# Altium PCB PCBLAST.PcbDoc
Units mm, origin at the board's own origin, x right, y up, seen from the top; angles counter-clockwise.
Board outline 98.04 x 98.81 mm, 2 copper layers (Top Layer, Bottom Layer); 65 components, 53 nets, 192 pads, 5 vias.
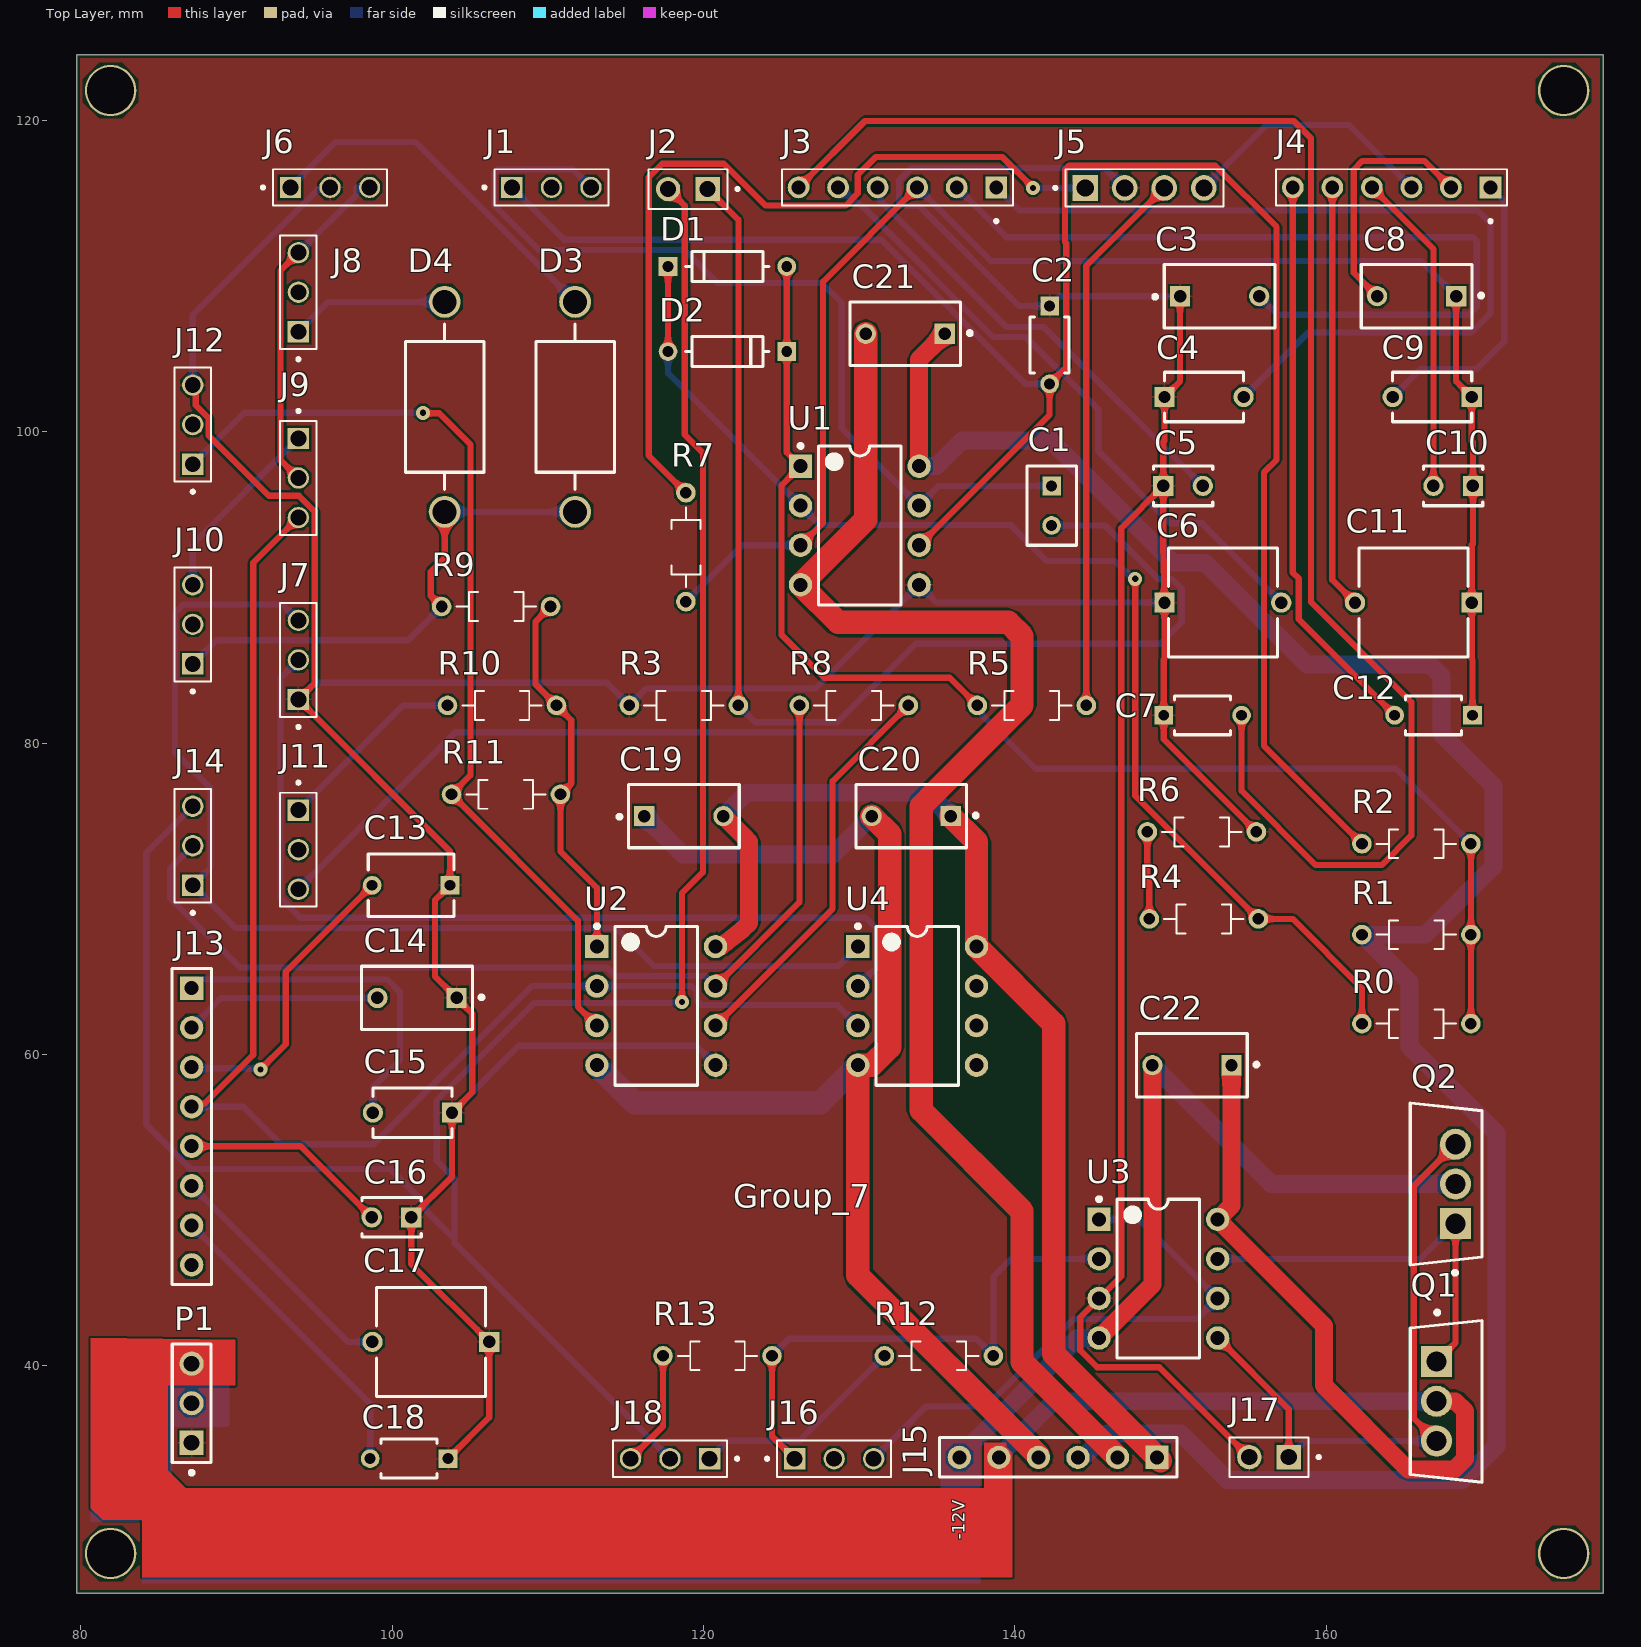
[diagram p0: Top Layer view]
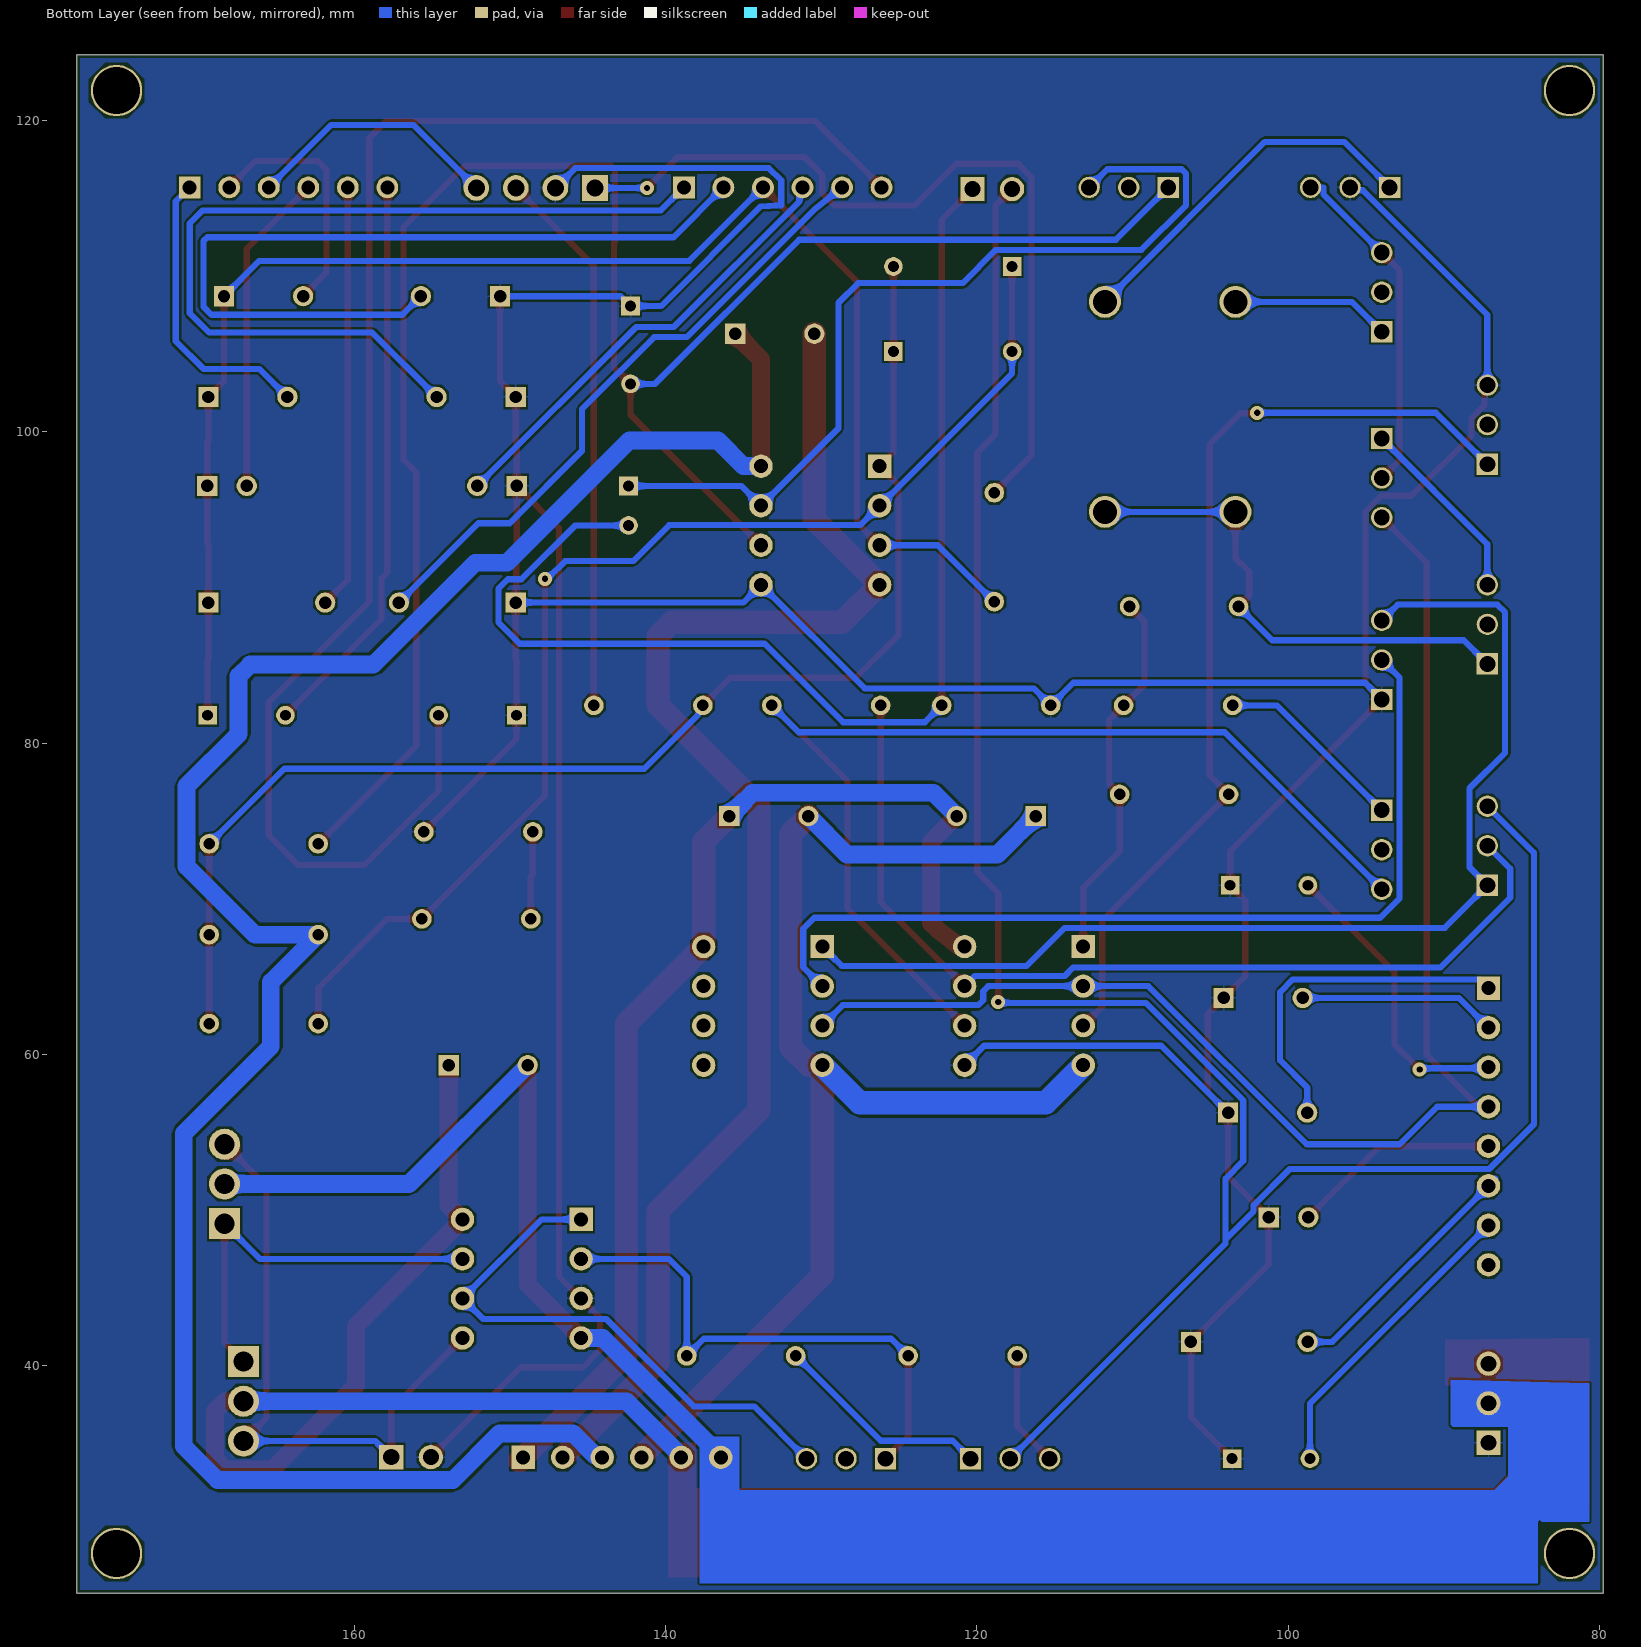
[diagram p1: Bottom Layer view, seen from below]
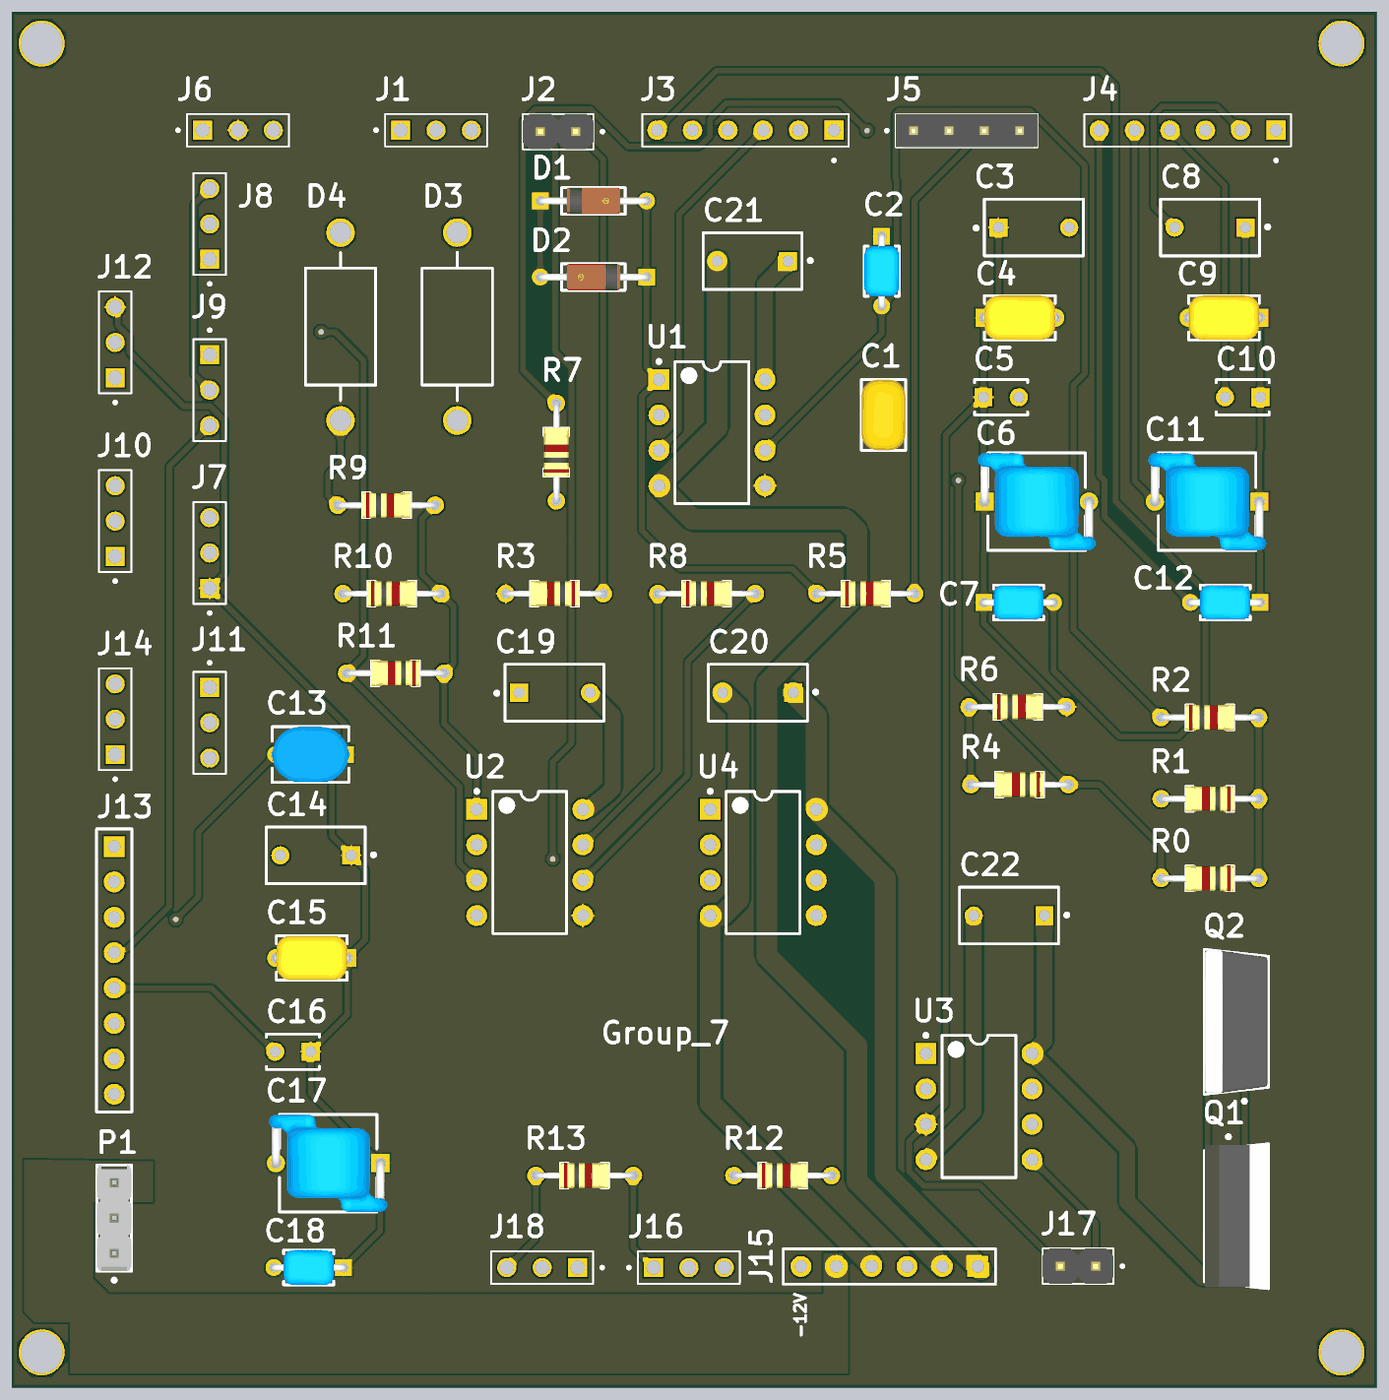
[diagram p2: 3D render of the assembled board from above, using the file's embedded part models]

## Layer stack, top to bottom
Top Solder: solder mask 0.0102, Solder Resist, Dk 3.5
Top Layer: signal copper 0.0356
Dielectric 1: dielectric 0.32, FR-4, Dk 4.8
Bottom Layer: signal copper 0.0356
Bottom Solder: solder mask 0.0102, Solder Resist, Dk 3.5

## Board outline
79.756,25.4 177.8,25.4 177.8,124.206 79.756,124.206

## Design rules (kind name [scope] priority, off if disabled: settings)
BoardOutlineClearance [All] p1: gap=0.2 ignorepadtopadclearanceinfootprint=FALSE
Clearance [All] p1: gap=0.127 ignorepadtopadclearanceinfootprint=FALSE except(0.25: Arc-Hole Track-Hole SMDPad-Hole THPad-Hole Via-Hole Fill-Hole Poly-Hole Region-Hole Text-Hole)
ComponentClearance [All] p1: gap=0.127 collisioncheckmode=3 verticalgap=0.127 showdistances=TRUE
DiffPairsRouting [All] p1: maxlimit=0.254 minlimit=0.127 mostfreqgap=0.127 toplayer_minwidth=0.127 toplayer_maxwidth=25.4 toplayer_prefwidth=0.127 bottomlayer_minwidth=0.127 bottomlayer_maxwidth=25.4 bottomlayer_prefwidth=0.127 maxuncoupledlength=12.7
Height [All] p1: minheight=0 maxheight=1816.048 prefheight=12.7
HoleSize [All] p1: absolutevalues=TRUE maxlimit=6.3 minlimit=0.3 maxpercent=80.000 minpercent=20.000
HoleToHoleClearance [All] p1: gap=0.25 allowstackedmicrovias=FALSE
MinimumAnnularRing [All] p1: minimumring=0.076
MinimumSolderMaskSliver [All] p1: minsoldermaskwidth=0
PlaneClearance [All] p1: clearance=0.127
PlaneConnect PlaneConnectPowerPads [InPadClass('PowerPads')] p1: planeconnectstyle=Direct reliefexpansion=0.508 reliefentries=4 reliefconductorwidth=0.254 reliefairgap=0.254
PlaneConnect [All] p2: pad.planeconnectstyle=Relief pad.reliefexpansion=0.3 pad.reliefentries=4 pad.reliefconductorwidth=0.127 pad.reliefairgap=0.127 via.planeconnectstyle=Direct via.reliefexpansion=0.3 via.reliefentries=4 via.reliefconductorwidth=0.127 via.reliefairgap=0.127
PolygonConnect PolygonConnectPowerPads [All vs (InPadClass('PowerPads'))] p1: connectstyle=Direct reliefconductorwidth=0.254 reliefentries=4 polygonreliefangle="90 Angle" airgapwidth=0.254
PolygonConnect [All] p2: thpad.connectstyle=Relief thpad.reliefconductorwidth=0.127 thpad.reliefentries=4 thpad.polygonreliefangle="90 Angle" thpad.airgapwidth=0.127 smdpad.connectstyle=Relief smdpad.reliefconductorwidth=0.127 smdpad.reliefentries=4 smdpad.polygonreliefangle="90 Angle" smdpad.airgapwidth=0.127 via.connectstyle=Direct via.reliefconductorwidth=0.127 via.reliefentries=4 via.polygonreliefangle="90 Angle" via.airgapwidth=0.127
RoutingVias [All] p1: holewidth=0.3 width=0.6 viastyle="Through Hole" minholewidth=0.3 minwidth=0.6 maxholewidth=0.6 maxwidth=6.6
SilkToSilkClearance [All] p1: silktosilkclearance=0
SilkToSolderMaskClearance [IsPad] p1: minsilkscreentomaskgap=0.127 clearancetoexposedcopper=TRUE
SolderMaskExpansion [All] p1: expansion=0.075 istentingtop=FALSE
Width [All] p1: maxlimit=25.4 minlimit=0.127 preferedwidth=0.127 minimp=50.000000 maximp=50.000000 favimp=50.000000
20 further rules are at their usual default settings.

## Components (designator, comment, footprint, x,y, rotation, side; value= is the part's Value field where it differs from the comment)
C1 "SR205C104KAR" FP-SR20-MFG 142.367,95.25 r270 top value=100nF
C2 "RCE5C1H271J0K1H03B" FP-RCE0K1-MFG 142.24,105.577 r270 top
C3 "1uF" KEMT-C330C105M5U5TA 153.162,108.712 r0 top
C4 "100nF" FP-C322C104K5R5TA-MFG 152.159,102.235 r0 top
C5 "10nF" KEMT-C315-THT-2 150.814,96.52 r0 top
C6 "1nF" FP-DE6_D7_T7_F7_5_d0_6-0-MFG 153.369,89.027 r0 top
C7 "100pF" FP-RCE0K1-MFG 152.069,81.788 r0 top
C8 "1uF" KEMT-C330C105M5U5TA 165.815,108.712 r180 top
C9 "100nF" FP-C322C104K5R5TA-MFG 166.818,102.235 r180 top
C10 "10nF" KEMT-C315-THT-2 168.163,96.52 r180 top
C11 "1nF" FP-DE6_D7_T7_F7_5_d0_6-0-MFG 165.608,89.027 r180 top
C12 "100pF" FP-RCE0K1-MFG 166.908,81.788 r180 top
C13 "10uF" FP-RCE3M1-MFG 101.219,70.866 r180 top
C14 "1uF" KEMT-C330C105M5U5TA 101.599,63.627 r180 top
C15 "100nF" FP-C322C104K5R5TA-MFG 101.309,56.261 r180 top
C16 "10nF" KEMT-C315-THT-2 99.964,49.53 r180 top
C17 "1nF" FP-DE6_D7_T7_F7_5_d0_6-0-MFG 102.489,41.529 r180 top
C18 "100pF" FP-RCE0K1-MFG 101.092,34.036 r180 top
C19 "1uF" KEMT-C330C105M5U5TA 118.745,75.311 r0 top
C20 "1uF" KEMT-C330C105M5U5TA 133.35,75.311 r180 top
C21 "1uF" KEMT-C330C105M5U5TA 132.969,106.299 r180 top
C22 "1uF" KEMT-C330C105M5U5TA 151.384,59.309 r180 top
D1 "1N4148" FP-017AG-MFG 121.539,110.617 r0 top
D2 "1N4148" FP-017AG-MFG 121.539,105.156 r180 top
D3 "1N5820" ONSC-AXIAL_LEAD-2-267-05_V 111.76,101.6 r90 top
D4 "1N5820" ONSC-AXIAL_LEAD-2-267-05_V 103.378,101.6 r270 top
J1 "3-644456-3" TE_3-644456-3 107.696,115.697 r0 top
J2 "861400021YO2LF" AMPHENOL_861400021YO2LF 118.999,115.595 r180 top
J3 "4-103327-6" TE_4-103327-6 132.461,115.697 r180 top
J4 "4-103327-6" TE_4-103327-6 164.211,115.697 r180 top
J5 "77311-102S04LF" AMPHENOL_77311-102S04LF 148.336,115.665 r0 top
J6 "3-644456-3" TE_3-644456-3 93.472,115.697 r0 top
J7 "3-644456-3" TE_3-644456-3 93.98,82.804 r90 top
J8 "3-644456-3" TE_3-644456-3 93.98,106.426 r90 top
J9 "3-644456-3" TE_3-644456-3 93.98,99.568 r270 top
J10 "3-644456-3" TE_3-644456-3 87.195,85.09 r90 top
J11 "3-644456-3" TE_3-644456-3 93.98,75.692 r270 top
J12 "3-644456-3" TE_3-644456-3 87.195,97.917 r90 top
J13 "Header 8" HDR1X8 87.122,64.262 r270 top
J14 "3-644456-3" TE_3-644456-3 87.195,70.866 r90 top
J15 "Header 6" HDR1X6 149.142,34.112 r180 top
J16 "3-644456-3" TE_3-644456-3 125.857,34.029 r0 top
J17 "861400021YO2LF_SWITCH" AMPHENOL_861400021YO2LF 156.337,34.131 r180 top
J18 "3-644456-3" TE_3-644456-3 120.396,34.029 r180 top
P1 "22-28-4033" MOLX-22-28-4033_V 87.122,37.592 r90 top
Q1 "TIP31C" FP-TO-220-P0A0015988-MFG 167.708,37.719 r0 top
Q2 "TIP32C" FP-TO-220-P0A0015988-MFG 167.708,51.679 r180 top
R0 "3-1623927-1" RESAD700W45L350D185 165.803,61.976 r0 top
R1 "3-1623927-1" RESAD700W45L350D185 165.803,67.691 r0 top
R2 "3-1623927-1" RESAD700W45L350D185 165.803,73.533 r180 top
R3 "3-1623927-1" RESAD700W45L350D185 118.745,82.423 r0 top
R4 "3-1623927-1" RESAD700W45L350D185 152.146,68.707 r0 top
R5 "3-1623927-1" RESAD700W45L350D185 141.097,82.423 r180 top
R6 "3-1623927-1" RESAD700W45L350D185 152.019,74.295 r180 top
R7 "3-1623927-1" RESAD700W45L350D185 118.872,92.583 r270 top
R8 "3-1623927-1" RESAD700W45L350D185 129.667,82.423 r180 top
R9 "3-1623927-1" RESAD700W45L350D185 106.68,88.773 r180 top
R10 "3-1623927-1" RESAD700W45L350D185 107.061,82.423 r180 top
R11 "3-1623927-1" RESAD700W45L350D185 107.315,76.708 r0 top
R12 "3-1623927-1" RESAD700W45L350D185 135.128,40.64 r180 top
R13 "3-1623927-1" RESAD700W45L350D185 120.904,40.64 r180 top
U1 "NE5532N" ONSC-PDIP-8-626-05 130.048,93.98 r0 top
U2 "NE5532N" ONSC-PDIP-8-626-05 116.967,63.119 r0 top
U3 "NE5532N" ONSC-PDIP-8-626-05 149.225,45.593 r0 top
U4 "NE5532N" ONSC-PDIP-8-626-05 133.731,63.119 r0 top

## Footprints (in the part's own frame and the unit in brackets; to place one, negate y for a bottom-side part, rotate by r counter-clockwise, add the part's x,y. Pads: shape width x height; smd on the part's side, far side on the other; paste and mask are expansions set on the pad)
AMPHENOL_77311-102S04LF [mm]
  rect 1.65x1.65 hole 1.1: 01(-3.81,0)
  round 1.65 hole 1.1: 02(-1.27,0) 03(1.27,0) 04(3.81,0)
  silkscreen extent -5.83,-1.2 5.08,1.2, body extent -5.08,-1.2 5.08,1.2, height 8.38
AMPHENOL_861400021YO2LF [mm]
  rect 1.56x1.56 / inner round 1.56 / far side rect 1.56x1.56 hole 1.04: 01(-1.27,0)
  round 1.56 hole 1.04: 02(1.27,0)
  silkscreen extent -3.29,-1.27 2.54,1.27, body extent -2.54,-1.27 2.54,1.27, height 9.6
FP-017AG-MFG [mm]
  rect 1.2x1.2 hole 0.7 paste-1000 mask+0: 1(-3.813,0)
  round 1.2 hole 0.7 paste-1000 mask+0: 2(3.813,0)
  silkscreen extent -2.68,-0.95 2.68,0.95, body extent -4.51,-1.05 4.51,1.05, height 0.25
FP-C322C104K5R5TA-MFG [mm]
  rect 1.3x1.3 hole 0.8 paste-1000 mask+0: 1(-2.54,0)
  round 1.3 hole 0.8 paste-1000 mask+0: 2(2.54,0)
  silkscreen extent -2.54,-1.59 2.54,1.59, body extent -3.29,-1.69 3.29,1.69, height 0.25
FP-DE6_D7_T7_F7_5_d0_6-0-MFG [mm]
  rect 1.3x1.3 hole 0.8 paste-1000 mask+0: 1(-3.75,0)
  round 1.3 hole 0.8 paste-1000 mask+0: 2(3.75,0)
  silkscreen extent -3.5,-3.5 3.5,3.5, body extent -4.5,-3.6 4.5,3.6, height 0.25
FP-RCE0K1-MFG [mm]
  rect 1.2x1.2 hole 0.7 paste-1000 mask+0: 1(-2.5,0)
  round 1.2 hole 0.7 paste-1000 mask+0: 2(2.5,0)
  silkscreen extent -1.8,-1.25 1.8,1.25, body extent -3.2,-1.35 3.2,1.35, height 0.25
FP-RCE3M1-MFG [mm]
  rect 1.2x1.2 hole 0.7 paste-1000 mask+0: 1(-2.5,0)
  round 1.2 hole 0.7 paste-1000 mask+0: 2(2.5,0)
  silkscreen extent -2.75,-2 2.75,2, body extent -3.2,-2.1 3.2,2.1, height 0.25
FP-SR20-MFG [mm]
  rect 1.2x1.2 hole 0.7 paste-1000 mask+0: 1(-1.27,0)
  round 1.2 hole 0.7 paste-1000 mask+0: 2(1.27,0)
  silkscreen extent -2.54,-1.59 2.54,1.59, body extent -2.64,-1.69 2.64,1.69, height 0.25
FP-TO-220-P0A0015988-MFG [mm]
  rect 2x2 hole 1.3 paste-1000 mask+0: 1(-0.607,2.55)
  round 2 hole 1.3 paste-1000 mask+0: 2(-0.607,0) 3(-0.607,-2.55)
  silkscreen extent -2.3,-5.2 2.3,5.82, body extent -2.4,-5.3 2.4,5.3, height 0.25
HDR1X6 [mm] "Connector; Header; 6 Position"
  rect 1.5x1.5 hole 0.9: 1(0,0)
  round 1.5 hole 0.9: 2(2.54,0) 3(5.08,0) 4(7.62,0) 5(10.16,0) 6(12.7,0)
  silkscreen extent -1.27,-1.27 13.97,1.27
HDR1X8 [mm] "Connector; Header; 8 Position"
  rect 1.5x1.5 hole 0.9: 1(0,0)
  round 1.5 hole 0.9: 2(2.54,0) 3(5.08,0) 4(7.62,0) 5(10.16,0) 6(12.7,0) 7(15.24,0) 8(17.78,0)
  silkscreen extent -1.27,-1.27 19.05,1.27
KEMT-C315-THT-2 [mm] "THD, 2-Leads, Body 3.81x2.54mm"
  rect 1.3x1.3 hole 0.8: 1(-1.27,0)
  round 1.3 hole 0.8: 2(1.27,0)
  silkscreen extent -1.9,-1.27 1.91,1.27, body extent -1.91,-1.27 1.91,1.27, height 4.66
KEMT-C330C105M5U5TA [mm] "THD, 2-Leads, Body 7.11x4.07mm"
  rect 1.3x1.3 hole 0.8: 1(-2.54,0)
  round 1.3 hole 0.8: 2(2.54,0)
  silkscreen extent -4.27,-2.03 3.55,2.03, body extent -3.55,-2.03 3.55,2.03, height 9.14
MOLX-22-28-4033_V [mm] "THD, 3-Leads, Body 7.62x2.49mm, Pitch 2.54mm"
  rect 1.55x1.55 hole 1.02: 1(-2.54,0)
  round 1.55 hole 1.02: 2(0,0) 3(2.54,0)
  silkscreen extent -4.58,-1.25 3.81,1.25, body extent -3.81,-1.24 3.81,1.24, height 8.38
ONSC-AXIAL_LEAD-2-267-05_V [mm] "AXIAL, 2-Leads, Diameter 5.05mm"
  round 2.05 hole 1.55: 1(-6.745,0) 2(6.745,0)
  silkscreen extent -5.32,-2.53 5.32,2.53
ONSC-PDIP-8-626-05 [mm] "DIP, 8-Leads, Body 10.15x7.1mm, Pitch 2.54mm"
  rect 1.5x1.5 hole 0.9: 1(-3.81,3.81)
  round 1.5 hole 0.9: 2(-3.81,1.27) 3(-3.81,-1.27) 4(-3.81,-3.81) 5(3.81,-3.81) 6(3.81,-1.27) 7(3.81,1.27) 8(3.81,3.81)
  silkscreen extent -3.93,-5.1 2.65,5.23, body extent -3.95,-5.07 3.95,5.07, height 5.33
RESAD700W45L350D185 [mm]
  round 1.258 hole 0.75: 1(-3.5,0) 2(3.5,0)
  silkscreen extent -2.55,-0.93 2.55,0.93, body extent -3.72,-0.92 3.72,0.92, height 1.85
TE_3-644456-3 [mm]
  rect 1.37x1.37 hole 1.02: 1(0,0)
  round 1.37 hole 1.02: 2(2.54,0) 3(5.08,0)
  silkscreen extent -1.87,-1.17 6.2,1.17
TE_4-103327-6 [mm]
  rect 1.398x1.398 hole 0.89: 1(-6.35,0)
  round 1.398 hole 0.89: 2(-3.81,0) 3(-1.27,0) 4(1.27,0) 5(3.81,0) 6(6.35,0)
  silkscreen extent -7.42,-1.17 7.42,2.27

## Part data
C1: library part CMP-04427-000013-1, "CAP CER 0.1UF 50V X7R RADIAL", Capacitance=100nF, Manufacturer=AVX, Package=SR20, Temperature="-55°C to +125°C", Temperature Characteristic=X7R, Temperature Range High=+125°C, Temperature Range Low=-55°C, Tolerance=10%, Voltage=50V, Automotive=No, Category=Cap, ComponentLink2Description=Datasheet, ComponentLink2URL=http://datasheets.avx.com/SR-Series.pdf, Device Class L1="Passive Components", Device Class L2=Capacitors, Device Class L3="Ceramic Capacitors", Digikey Description="CAP CER 0.1UF 50V X7R RADIAL", Height=5.08mm, Lead Free=Yes, Manufacturer Part Number=SR205C104KAR, Material=Ceramic, Mouser Description="Multilayer Ceramic Capacitors MLCC - Leaded 50volts 0.1uF 10% X7R", Octopart=https://octopart.com/sr205c104kar-avx-145048, RoHS=TRUE, Voltage Rating=50V
C2: library part CMP-06035-042310-1, "Cap Ceramic 270pF 50V C0G ±5% Radial 5mm +125°C Automotive Bulk", Capacitance=270pF, Case/Package=Radial, Dielectric=C0G, Max Operating Temperature=125°C, Min Operating Temperature=-55°C, Package Quantity=500, Ratings=AEC-Q200, Resistor Type=Ceramic, Tolerance=5%, Voltage Rating=50V, Height=3.5mm, Height - Seated (Max)=0.138inch, Lead Diameter=0.5mm, Lead Pitch=0.197inch, Lead/Base Style="Formed Leads", Length=0.142inch, Mount="Through Hole", Packaging=Bulk, Termination=Radial, Voltage Rating (DC)=50V, Width=2.5mm
C3 C8 C14 C19 C20 C21 C22: library part CMP-2000-06056-1, "Ceramic Capacitor, 1 uF, +/- 20%, 50 V, -10 to 85 degC, 2-Pin THD, RoHS, Bulk", Capacitance=1µF, Manufacturer=Kemet, Operating Temperature=10°C~85°C, Package / Case=Radial, Package Description="2-Pin Through Hole Device, Body 7.11 x 4.07 mm", Package Reference=C330C105M5U5TA, Ratings=-, Standard Package=250, Temperature Coefficient=Z5U, Tolerance=±20%, Voltage - Rated=50V, Applications=GeneralPurpose, Catalog Drawings=C330(std), Category=Capacitors, Datasheet URL=http://www.kemet.com/Lists/ProductCatalog/Attachments/599/KEM_C1051_GOLDMAX_Z5U.pdf, Datasheet Version=12/2015, Family=CeramicCapacitors, Features=-, Height - Seated (Max)="0.360\"(9.14mm)", Lead Spacing="0.200\"(5.08mm)", Lead Style=Straight, Manufacturer URL=http://www.kemet.com/, Mounting Technology=ThroughHole, Mounting Type=ThroughHole, Online Catalog=GoldenMax™Series, Other Names=399-4390, Packaging=Bulk, PCN Design/Specification=C3yySeriesGoldenMaxLeadConfiguration02/Feb/2015, Product Training Modules=CapacitorBasics-TypicalUsesforCapacitors, Series=GoldenMax™, Size / Dimension="0.300\"Lx0.150\"W(7.62mmx3.81mm)", Thickness (Max)=-
C4 C9 C15: library part CMP-03020-034661-1, "CAP CER 0.1UF 50V X7R RADIAL", Case/Package=Radial, Dielectric=X7R, Dielectric Material=Ceramic, Max Operating Temperature=125°C, Min Operating Temperature=-55°C, Package Quantity=500, Tolerance=10%, Voltage=50V, Capacitance=100nF, Construction=RADIAL, Depth=3.18mm, Dissipation Factor=2.5%, Height=3.18mm, Height - Seated (Max)=0.26inch, Lead Diameter=0.51mm, Lead Free="Lead Free", Lead Length=7mm, Lead Pitch=5.08mm, Lead/Base Style="Formed Leads", Length=5.08mm, Material=Ceramic, Mount="Through Hole", Number of Pins=2, Packaging=Bulk, Radiation Hardening=No, REACH SVHC="No SVHC", RoHS Compliant=Yes, Series="Golden Max™", Termination=Radial, Voltage Rating=50V, Voltage Rating (DC)=50V, Weight=0.0625lb, Width=0.125inch
C5 C10 C16: library part CMP-1664-00007-1, "Capacitor, Ceramic, 0.01 uF, +/- 10%, 100 V, X7R, -55 to 125 degC, 2-Pin THD, RoHS, Bulk", Case\Package=PDIP, Forward Current="60 mA", Forward Voltage="1.5 V", Max Operating Temperature="100 degC", Max Power Dissipation="400 mW", Min Operating Temperature="-55 degC", Output Voltage="70 V", Package Quantity=2000, Channels=2, ComponentLink1Description="Manufacturer URL", ComponentLink1URL=http://www.kemet.com/, ComponentLink2Description=Datasheet, ComponentLink2URL=http://capacitoredge.kemet.com/capedge2/DataSheet/Datasheet-C315C103K1R5TA.pdf?pn=C315C103K1R5TA{BULK}, DatasheetVersion=Aug-16, Mount="Through Hole", Nominal Vf="1.3 V", PackageDescription="2-Pin Through Hole Device, Body 3.81 x 2.54 mm", PackageReference=C315-THT-2, Packaging=Rail/Tube, Pins=16, Radiation Hardening=No, REACH SVHC=Unknown, RoHSCompliant=true, Vce Max="500 mV"
C6 C11 C17: library part CMP-06035-062244-1, "CAP CER 1000PF 300VAC RADIAL", Case/Package=Radial, Max Operating Temperature=125°C, Min Operating Temperature=-25°C, Package Quantity=700, Ratings=AEC-Q200, Resistor Type=Ceramic, Tolerance=20%, Voltage Rating (AC)=300V, Capacitance=1nF, Depth=7mm, Height - Seated (Max)=0.394inch, Lead Diameter=0.6mm, Lead Pitch=7.5mm, Lead/Base Style="Formed Leads", Material=Ceramic, Mount="Through Hole", Packaging=Bulk, REACH SVHC="No SVHC", RoHS Compliant=Yes, Series=KJ, Termination=Radial, Width=7mm
C7 C12 C18: library part CMP-06035-040252-1, "Cap Ceramic 100pF 50V C0G ±5% Radial 5mm +125°C Automotive Bulk", Case/Package=Radial, Dielectric=C0G, Max Operating Temperature=125°C, Min Operating Temperature=-55°C, Package Quantity=500, Ratings=AEC-Q200, Resistor Type=Ceramic, Tolerance=5%, Voltage Rating=50V, Capacitance=100pF, Height=3.5mm, Height - Seated (Max)=0.138inch, Lead Diameter=0.5mm, Lead Pitch=0.197inch, Lead/Base Style="Formed Leads", Length=0.142inch, Mount="Through Hole", Packaging=Bulk, Termination=Radial, Voltage Rating (DC)=50V, Width=2.5mm
C13: library part CMP-06035-005744-1, "Cap Ceramic 10uF 25V X7R ±10% Radial 5mm +125°C Automotive Ammo Pack", Case/Package=Radial, Dielectric=X7R, Max Operating Temperature=125°C, Min Operating Temperature=-55°C, Package Quantity=1500, Ratings=AEC-Q200, Resistor Type=Ceramic, Tolerance=10%, Voltage Rating=25V, Capacitance=10uF, Height=5mm, Height - Seated (Max)=0.197inch, Lead Diameter=0.5mm, Lead Pitch=0.197inch, Lead/Base Style="Formed Leads", Length=0.217inch, Mount="Through Hole", Packaging="Tape and Reel", Termination=Radial, Voltage Rating (DC)=25V, Width=0.157inch
D1 D2: library part CMP-07163-000046-1, "DIODE GEN PURP 100V 200MA DO35", Average Rectified Current=200mA, Capacitance=4pF, Case/Package=DO-35, Current=4A, Forward Current=300mA, Forward Voltage=1V, Max Forward Surge Current (Ifsm)=1A, Max Operating Temperature=175°C, Max Power Dissipation=500mW, Max Repetitive Reverse Voltage (Vrrm)=100V, Max Reverse Current=5uA, Min Operating Temperature=-65°C, Package Quantity=2000, Contact Plating=Tin, Current Rating=200mA, Diameter=1.91mm, Element Configuration=Single, Height=4.56mm, Lead Free="Lead Free", Length=4.56mm, Max Reverse Voltage (DC)=100V, Max Surge Current=4A, Mount="Through Hole", Number of Pins=2, Output Current=200mA, Outside Diameter=1.85mm, Packaging=Bulk, Peak Non-Repetitive Surge Current=4A, Polarity=Standard, Power Dissipation=500mW, Radiation Hardening=No, REACH SVHC="No SVHC", Recovery Time=4ns, Reverse Recovery Time=4ns, Reverse Voltage=100V, Series=-, Voltage=100V, Voltage Rating (DC)=100V, Weight=0.01lb, Width=1.91mm
D3 D4: library part CMP-1055-00030-1, "Rectifier, 2-Pin Axial_Lead, Bulk Bag", Manufacturer="On Semiconductor", ComponentLink1Description="Manufacturer URL", ComponentLink1URL=http://www.onsemi.com/, ComponentLink2Description=Datasheet, ComponentLink2URL=http://www.onsemi.cn/pub_link/Collateral/1N5820-D.PDF, ComponentLink3Description="Package Specification", ComponentLink3URL=http://www.onsemi.com/pub_link/Collateral/267-05.PDF, Configuration=Single, DatasheetVersion="Rev. 10", IFSM Max (A)=80, Mounting Technology="Through Hole", Note1=0, PackageDescription="2-Pin, Axial Lead, Diameter 5.05 mm", PackageReference=AXIAL_LEAD-2-267-05, PackageVersion="Rev. G, 06/2000", Packing="Bulk Bag", PartNumber=1N5820, RoHS=FALSE
J1 J6 J7 J8 J9 J10 J11 J12 J14 J16 J18: "MTA-100 3 Position Through-Hole Single Row Straight Wire to Board Header", Package=None, Availability=Unavailable, Centerline_Pitch="2.54 mm[.1 in]", MF="TE Connectivity", MP=3-644456-3, Number_of_Positions=3, Price=None, Product_Type=Connector, SnapEDA_Link=https://www.snapeda.com/parts/3-644456-3/TE%20Connectivity%20AMP%20Connectors/view-part/2772999/?ref=snap, TE_purchase_URL=https://www.te.com/usa-en/product-3-644456-3.html?te_bu=Cor&te_type=disp&te_campaign=seda_glo_cor-seda-global-disp-prtnr-fy19-seda-model-bom-cta_sma-317_1&elqCampaignId=32493
J2: "Board to Board connector, Unshrouded Header, Through Hole, Single Row, 2 Position, Vertical.", Package=None, Availability="In Stock", Check_prices=https://www.snapeda.com/parts/861400021YO2LF/Amphenol+FCI/view-part/?ref=eda, MF="Amphenol ICC (FCI)", MP=861400021YO2LF, Price=None, Purchase-URL=https://pricing.snapeda.com/search/part/861400021YO2LF/?ref=eda, SnapEDA_Link=https://www.snapeda.com/parts/861400021YO2LF/Amphenol+FCI/view-part/?ref=snap
J3 J4: "6 Position Single Row 2.54 mm Through-Hole Straight AMPMODU Breakaway Header", Package=None, Availability=Unavailable, Centerline_Pitch="2.54 mm[.1 in]", MF="TE Connectivity", MP=4-103327-6, Number_of_Positions=6, Price=None, Product_Type=Connector, SnapEDA_Link=https://www.snapeda.com/parts/4-103327-6/TE%20Connectivity%20AMP%20Connectors/view-part/2779147/?ref=snap, TE_purchase_URL=https://www.te.com/usa-en/product-4-103327-6.html?te_bu=Cor&te_type=disp&te_campaign=seda_glo_cor-seda-global-disp-prtnr-fy19-seda-model-bom-cta_sma-317_1&elqCampaignId=32493
J5: "BergStikÂ® 2.54mm, Board To Board, Unshrouded Header, 2.54 mm Pitch, Vertical, Single Row,Through Hole, 4 positions.", Package=None, Availability="In Stock", Check_prices=https://www.snapeda.com/parts/77311-102S04LF/Amphenol+FCI/view-part/?ref=eda, MF="Amphenol ICC (FCI)", MP=77311-102S04LF, Price=None, Purchase-URL=https://pricing.snapeda.com/search/part/77311-102S04LF/?ref=eda, SnapEDA_Link=https://www.snapeda.com/parts/77311-102S04LF/Amphenol+FCI/view-part/?ref=snap
J13: "Header, 8-Pin", LatestRevisionDate=17-Jul-2002, LatestRevisionNote="Re-released for DXP Platform.", Publisher="Altium Limited"
J15: "Header, 6-Pin", LatestRevisionDate=17-Jul-2002, LatestRevisionNote="Re-released for DXP Platform.", Publisher="Altium Limited"
J17: library part 861400021YO2LF, "Board to Board connector, Unshrouded Header, Through Hole, Single Row, 2 Position, Vertical.", Package=None, Availability="In Stock", Check_prices=https://www.snapeda.com/parts/861400021YO2LF/Amphenol+FCI/view-part/?ref=eda, MF="Amphenol ICC (FCI)", MP=861400021YO2LF, Price=None, Purchase-URL=https://pricing.snapeda.com/search/part/861400021YO2LF/?ref=eda, SnapEDA_Link=https://www.snapeda.com/parts/861400021YO2LF/Amphenol+FCI/view-part/?ref=snap
P1: library part CMP-1676-00001-5, "Male Header, Pitch 2.54 mm, 1 x 3 Position, Height 8.38 mm, Tail Length 3.18 mm, RoHS, Bulk", Colour=Black, Current Rating="4 A", Manufacturer=Molex, Max Operating Temperature="75 degC", Min Operating Temperature="0 degC", Package Quantity=1, Voltage Rating="250 V", ComponentLink1Description="Manufacturer URL", ComponentLink1URL=http://www.molex.com/, ComponentLink2Description=Datasheet, ComponentLink2URL=http://www.molex.com/pdm_docs/sd/022284033_sd.pdf, Contact Finish=Gold, Contact Material=Brass, Contact Plating=Gold, DatasheetVersion="Rev. G, 01/2012", Height="8.38 mm", Lead Pitch="0.1 inch", Length="7.62 mm", Mount="Through Hole", Mounting Technology="Through Hole", PackageDescription="Male Header, Pitch 2.54 mm, 1 x 3 Position, Height 8.38 mm, Tail Length 3.18 mm", PackageReference=22-28-4033, Packaging=Bulk, Pins=3, REACH SVHC=Unknown, RoHSCompliant=true, Rows=1
Q1: library part CMP-12195-000001-1, "TRANS NPN 100V 3A TO-220", Collector Base Voltage=100V, Collector Emitter Saturation Voltage=1.2V, Emitter Base Voltage=5V, Manufacturer=STMicroelectronics, Max Collector Current=3A, Max Junction Temp=+150°C, Package=TO-220-P0A0015988, Power Dissipation=2W, Temperature="to +150°C", Automotive=No, Category=Trans, Collector Emitter Voltage=100V, ComponentLink2Description=Datasheet, ComponentLink2URL=https://www.st.com/resource/en/datasheet/tip31c.pdf, Device Class L1="Discrete Semiconductors", Device Class L2=Transistors, Device Class L3=BJTs, Digikey Description="TRANS NPN 100V 3A TO-220", Height=19.68mm, Hfe Max=50, Hfe Min=10, Hfe Testic=3A, Hfe Testvce=4V, Lead Free=Yes, Manufacturer Part Number=TIP31C, Mouser Description="Bipolar Transistors - BJT NPN Gen Pur Power", Number Of Elements=1, Number Of Npn=1, Octopart=https://octopart.com/tip31c-stmicroelectronics-15555, RoHS=TRUE, Standoff Height=3.5mm, Temperature Range High=+150°C
Q2: library part CMP-12195-000005-1, "TRANS PNP 100V 3A TO-220", Collector Base Voltage=-100V, Collector Emitter Saturation Voltage=-1.2V, Emitter Base Voltage=-5V, Manufacturer=STMicroelectronics, Max Collector Current=-3A, Max Junction Temp=+150°C, Package=TO-220-P0A0015988, Power Dissipation=2W, Temperature="to +150°C", Automotive=No, Category=Trans, Collector Emitter Voltage=-100V, ComponentLink2Description=Datasheet, ComponentLink2URL=https://www.st.com/resource/en/datasheet/tip32c.pdf, Device Class L1="Discrete Semiconductors", Device Class L2=Transistors, Device Class L3=BJTs, Digikey Description="TRANS PNP 100V 3A TO-220", Height=19.68mm, Hfe Max=50, Hfe Min=10, Hfe Testic=-3A, Hfe Testvce=-4V, Lead Free=Yes, Manufacturer Part Number=TIP32C, Mouser Description="Original ST Microelectronics Transistor, 100V, 3A, .22 Ohm, TO-220 Package", Number Of Elements=1, Number Of Pnp=1, Octopart=https://octopart.com/tip32c-stmicroelectronics-353617, RoHS=TRUE, Standoff Height=3.5mm, Temperature Range High=+150°C
R0 R1 R2 R3 R4 R5 R6 R7 R8 R9 R10 R11 R12 R13: "1 MOhms Â±5% 0.25W, 1/4W Through Hole Resistor Axial - Carbon Film", Package=None, Availability="In Stock", Check_prices=https://www.snapeda.com/parts/3-1623927-1/TE+Connectivity/view-part/?ref=eda, MF="TE Connectivity", MP=3-1623927-1, Price=None, SnapEDA_Link=https://www.snapeda.com/parts/3-1623927-1/TE+Connectivity/view-part/?ref=snap
U1 U2 U3 U4: library part CMP-1310-00070-1, "Internally Compensated Dual Low Noise Operational Amplifier, 6 to 40 V, 0 to 70 degC, 8-Pin PDIP, Tube", Manufacturer="On Semiconductor", ComponentLink1Description="Manufacturer URL", ComponentLink1URL=http://www.onsemi.com/, ComponentLink2Description=Datasheet, ComponentLink2URL=http://www.onsemi.cn/pub_link/Collateral/NE5532-D.PDF, ComponentLink3Description="Package Specification", ComponentLink3URL=http://www.onsemi.cn/pub_link/Collateral/626-05.PDF, DatasheetVersion="Rev. 2", GBW Typ (MHz)=10, Mounting Technology="Through Hole", PackageDescription="8-Pin Plastic Dual-In Line Package, Body 9.59 x 6.605 mm, Pitch 2.54 mm", PackageReference=PDIP-8-626-05, PackageVersion="Rev. N, 06/2013", Packing=Tube, PartNumber=NE5532N, RoHS=FALSE, SR Typ (V/uS)=9, VCC Max (V)=40, VCC Min (V)=6

## Free pads (board coordinates)
  round 3.3 hole 3: 2(81.915,121.92) 4(175.26,121.92) 5(175.26,27.94) 6(81.915,27.94)

## Via types
v1: diameter 0.9, hole 0.4, Top Layer to Bottom Layer, tented both sides, 5 vias

## Nets (pads, with @x,y where several pads share a name; then routed paths per layer and width w, separated by ;. In a path a pad name is that pad's centre, name@x,y a point inside that pad or via, vN(x,y) a via of type N, cw(c..) or ccw(c..) an arc to the next point about the centre after c; other vN are vias at no path point)
+12: C22.1 J15.5 P1.3 Q1.2 U3.8 | length 70.2
  Top Layer w1.15: C22.1 153.924,50.292 U3.8 159.868,42.57 159.868,38.735 165.278,33.325 168.224,33.325 168.935,34.036 168.935,37.084 168.3,37.719 Q1.2
  Bottom Layer w1.15: J15.5@138.938,34.156 142.501,37.719 Q1.2
-12: C22.2 J15.6 P1.2 Q2.2 U3.4 | length 53.8
  Top Layer w1.15: U3.4 148.844,45.212 C22.2
  Bottom Layer w1.15: J15.6@136.398,34.156 144.025,41.783 U3.4 ; C22.2 156.474,51.679 Q2.2
Cout_13: C13.2 J13.3 | length 19.3
  Top Layer w0.4: v1(91.546,59.034) 93.167,60.655 93.167,65.314 C13.2
  Bottom Layer w0.4: J13.3 87.196,59.108 91.471,59.108 v1(91.546,59.034)
Cout_14: C14.2 J13.2 | length 12.7
  Bottom Layer w0.4: J13.2 89.027,63.627 C14.2
Cout_15: C15.2 J13.1 | length 22.6
  Bottom Layer w0.4: J13.1@87.025,64.165 87.672,64.812 87.898,64.812 87.906,64.821 99.695,64.821 100.508,64.008 100.508,59.614 98.769,57.875 C15.2
Cout_16: C16.2 J13.5 | length 13.5
  Top Layer w0.4: J13.5 94.122,54.102 C16.2
Cout_17: C17.2 J13.6 | length 16.4
  Bottom Layer w0.4: J13.6@86.667,52.017 97.155,41.529 C17.2
Cout_18: C18.2 J13.7 | length 19.9
  Bottom Layer w0.4: J13.7@87.026,49.118 98.592,37.552 C18.2
GND: C2.1 C3.1 C4.1 C5.1 C6.1 C7.1 C13.1 C14.1 C15.1 C16.1 C17.1 C18.1 J5.02 J6.2 J7.1 J12.3 J17.02 P1.1 R3.1 R6.1 U1.5 U2.5 U3.3 | length 327
  Top Layer w0.4: J12.3 87.381,102.811 87.381,101.703 88.207,100.876 88.207,99.753 92.075,95.885 94.014,95.885 95.031,94.868 95.031,83.855 J7.1 103.719,73.065 C13.1 102.753,69.9 102.753,65.013 C14.1 105.155,62.611 105.155,57.567 C15.1 103.849,52.145 C16.1 101.234,46.534 C17.1 106.239,36.683 C18.1 ; C3.1 150.622,103.238 C4.1 149.619,99.414 149.544,99.339 C5.1 ; J17.02 149.295,39.903 145.288,39.903 144.206,40.985 144.206,43.114 146.837,45.745 146.837,93.813 C5.1 ; R6.1 149.569,80.245 C7.1 149.569,85.369 149.619,85.419 C6.1 149.544,92.81 C5.1
  Bottom Layer w0.4: J12.3 87.195,107.515 95.191,115.511 95.826,115.511 J6.2 ; J7.1 95.047,83.871 113.797,83.871 R3.1 116.337,83.515 127.203,83.515 U1.5 135.001,89.027 C6.1 ; C15.1 108.142,60.554 119.532,60.554 U2.5 ; J5.02 145.791,116.94 133.349,116.94 132.563,116.154 132.563,114.554 133.882,114.474 140.28,108.077 C2.1 142.875,108.712 C3.1
NetC1_1: C1.1 J1.3 U1.7 | length 57.9
  Bottom Layer w0.4: J1.3 111.608,116.865 106.832,116.865 106.553,116.586 106.553,114.554 109.423,111.684 118.77,111.684 120.904,109.55 127.61,109.55 128.88,108.28 128.88,100.228 U1.7 135.128,96.52 C1.1
NetC1_2: C1.2 J2.01 R3.2 | length 77.8
  Top Layer w0.4: J2.01 122.245,113.619 R3.2
  Bottom Layer w0.4: R3.2 123.324,81.344 128.588,81.344 133.629,86.385 149.352,86.385 150.724,87.757 150.724,89.916 150.114,90.526 149.25,90.526 145.796,93.98 C1.2
NetC2_2: C2.2 J1.1 R2.2 U1.6 | length 125.7
  Top Layer w0.4: U1.6 142.24,101.092 C2.2 143.307,104.144 143.307,112.116 143.231,112.192 143.231,116.84 143.485,117.094 152.883,117.094 156.82,113.157 156.82,98.196 156.007,97.384 156.007,79.829 R2.2
  Bottom Layer w0.4: J1.1 111.059,112.334 131.411,112.334 140.667,103.077 C2.2
NetC3_2: C3.2 J3.2 | length 53.7
  Bottom Layer w0.4: J3.2 139.471,112.497 169.438,112.497 169.672,112.262 169.672,108.026 169.164,107.518 156.896,107.518 C3.2
NetC4_2: C4.2 J3.1 | length 56.6
  Bottom Layer w0.4: J3.1 140.284,114.224 169.723,114.224 170.561,113.386 170.561,107.62 169.316,106.375 158.839,106.375 C4.2
NetC5_2: C5.2 J3.4 | length 29.2
  Bottom Layer w0.4: J3.4 131.382,115.506 131.382,114.815 139.467,106.731 141.873,106.731 C5.2
NetC6_2: C6.2 J3.5 | length 41
  Bottom Layer w0.4: J3.5 130.378,114.325 138.623,106.081 140.721,106.081 145.362,101.44 145.362,98.766 150.003,94.125 152.021,94.125 C6.2
NetC7_2: C7.2 J3.6 | length 101.2
  Top Layer w0.4: J3.6 130.378,119.964 157.937,119.964 159.029,118.872 159.029,89.078 165.481,82.626 165.481,74.066 163.576,72.161 159.334,72.161 154.569,76.927 C7.2
NetC8_1: C8.1 C9.1 C10.1 C11.1 C12.1 J3.3 R7.2 U1.3 | length 99.9
  Top Layer w0.4: U1.3 127.686,94.158 127.686,109.652 J3.3 ; C8.1 168.355,103.238 C9.1 169.358,99.414 169.433,99.339 C10.1 169.433,92.81 169.358,92.735 C11.1 169.358,85.419 169.408,85.369 C12.1
  Bottom Layer w0.4: R7.2 122.499,92.71 U1.3 ; J3.3 138.455,110.973 166.094,110.973 C8.1
NetC8_2: C8.2 J4.2 | length 15.9
  Top Layer w0.4: C8.2 161.773,110.214 161.773,116.84 162.331,117.399 166.319,117.399 J4.2
NetC9_2: C9.2 J4.1 | length 18.9
  Bottom Layer w0.4: C9.2 166.081,104.038 169.672,104.038 171.45,105.816 171.45,114.808 J4.1
NetC10_2: C10.2 J4.4 | length 20.8
  Top Layer w0.4: J4.4 166.893,111.745 C10.2
NetC11_2: C11.2 J4.5 | length 27.3
  Top Layer w0.4: J4.5 160.401,90.484 C11.2
NetC12_2: C12.2 J4.6 | length 36.6
  Top Layer w0.4: J4.6 157.861,90.957 158.242,90.576 158.242,87.954 C12.2
NetD1_1: D1.1 D2.2 R0.1 R4.2 U1.2 | length 78.2
  Top Layer w0.4: D2.2 D1.1 ; v1(147.737,90.551) 147.737,76.616 R4.2 157.861,68.707 162.303,64.265 R0.1
  Bottom Layer w0.4: D2.2 117.726,103.762 U1.2 127.483,94.005 139.751,94.005 142.062,91.694 146.431,91.694 147.478,90.647 147.642,90.647 v1(147.737,90.551)
NetD1_2: D1.2 D2.1 R0.2 R1.2 R2.1 R5.2 U1.1 | length 86.1
  Top Layer w0.4: D1.2 D2.1 125.352,98.676 U1.1 125.019,96.571 125.019,86.944 127.762,84.201 135.819,84.201 R5.2 ; R0.2 R1.2 R2.1
  Bottom Layer w0.4: R5.2 137.597,82.191 137.911,81.877 137.911,81.799 141.351,78.359 164.477,78.359 R2.1
NetD3_1: D3.1 D4.2 J10.1 R9.2 | length 32.6
  Top Layer w0.4: R9.2 102.489,89.464 102.489,91.003 103.378,91.892 D4.2
  Bottom Layer w0.4: J10.1 88.719,86.614 101.021,86.614 R9.2 ; D4.2 D3.1
NetD3_2: D3.2 J6.1 | length 23.8
  Bottom Layer w0.4: J6.1 96.393,118.618 101.487,118.618 D3.2
NetD4_1: D4.1 J8.1 | length 10.2
  Bottom Layer w0.4: J8.1 95.899,108.345 D4.1
NetJ2_02: J2.02 J14.3 J18.2 | length 146.1
  Top Layer w0.4: J2.02 118.796,114.528 118.796,99.822 119.964,98.654 119.964,71.704 118.618,70.358 v1(118.618,63.373)
  Bottom Layer w0.4: J14.3 84.201,72.952 84.201,55.5 87.062,52.639 99.887,52.639 102.211,50.315 102.211,49.935 104.013,48.133 ; J18.2 104.013,47.872 104.013,48.133 ; v1(118.618,63.373) 118.557,63.312 109.138,63.312 102.872,57.046 102.872,53.16 104.013,52.019 104.013,48.133
NetJ4_3: J4.3 J5.04 | length 16.7
  Bottom Layer w0.4: J5.04 156.191,119.71 161.468,119.71 J4.3
NetJ5_01: J5.01 R7.1 | length 53.6
  Top Layer w0.4: R7.1 116.484,98.471 116.484,116.357 117.348,117.221 121.31,117.221 124.003,114.529 129.134,114.529 129.921,115.316 129.921,116.51 131.064,117.653 139.192,117.653 v1(141.18,115.665)
  Bottom Layer w0.4: v1(141.18,115.665) J5.01
NetJ5_03: J5.03 R5.1 | length 35.3
  Top Layer w0.4: R5.1 144.597,110.656 J5.03
NetJ6_3: J6.3 J8.3 J9.2 | length 22
  Top Layer w0.4: J9.2 92.837,98.171 92.837,110.363 J8.3
  Bottom Layer w0.4: J8.3 97.714,115.24 97.714,115.697 J6.3
NetJ7_2: J7.2 U4.2 | length 59.1
  Bottom Layer w0.4: J7.2 92.837,84.201 92.837,70.028 94.086,68.779 130.433,68.779 131.14,68.072 131.14,65.608 U4.2
NetJ7_3: J7.3 J14.1 U4.1 | length 72.9
  Bottom Layer w0.4: J7.3 92.964,88.9 86.563,88.9 86.055,88.392 86.055,79.375 88.341,77.089 88.341,72.012 J14.1 89.932,68.129 114.357,68.129 116.797,65.689 128.681,65.689 U4.1
NetJ9_1: J9.1 J10.3 | length 12.2
  Bottom Layer w0.4: J10.3 87.195,92.783 J9.1
NetJ9_3: J9.3 J13.4 U2.2 U4.3 | length 90.7
  Top Layer w0.4: J13.4@87.421,56.306 87.421,56.644 87.63,56.852 87.967,56.852 91.084,59.969 91.084,91.592 J9.3
  Bottom Layer w0.4: J13.4@86.905,56.642 90.424,56.642 92.837,54.229 98.806,54.229 108.966,64.389 U2.2 119.253,64.389 119.583,64.059 119.583,63.475 119.888,63.17 128.6,63.17 U4.3
NetJ11_1: J11.1 R10.2 | length 12.4
  Bottom Layer w0.4: J11.1 100.711,82.423 R10.2
NetJ11_3: J11.3 R8.1 U2.6 | length 69.8
  Top Layer w0.4: U2.6 128.295,69.367 128.295,77.551 R8.1
  Bottom Layer w0.4: J11.3 104.062,80.694 131.438,80.694 R8.1
NetJ12_1: J12.1 R11.1 U2.3 | length 61.8
  Top Layer w0.4: v1(101.981,101.219) 102.015,101.185 103.031,101.185 105.029,99.187 105.029,77.922 R11.1 111.938,68.585 111.938,63.068 U2.3
  Bottom Layer w0.4: J12.1 90.497,101.219 v1(101.981,101.219)
NetJ14_2: J14.2 R8.2 U2.7 | length 61.6
  Top Layer w0.4: U2.7 126.167,69.779 R8.2
  Bottom Layer w0.4: J14.2 85.725,71.936 85.725,70.066 90.202,65.589 113.801,65.589 114.351,65.039 120.127,65.039 U2.7
NetJ16_1: J16.1 R12.1 R13.1 U3.2 | length 34.7
  Top Layer w0.4: R13.1 124.404,35.482 J16.1
  Bottom Layer w0.4: R13.1 125.496,41.732 137.536,41.732 R12.1 138.628,45.72 139.771,46.863 U3.2
NetJ16_3: J16.3 U3.1 U3.6 | length 36.1
  Bottom Layer w0.4: J16.3 134.298,37.39 138.183,37.39 143.795,43.002 151.714,43.002 U3.6 147.955,49.403 U3.1
NetJ17_01: J17.01 Q1.3 Q2.3 U3.5 | length 40.2
  Top Layer w0.4: U3.5 157.607,37.211 J17.01 ; Q1.3 165.633,36.636 165.633,51.547 Q2.3
  Bottom Layer w0.4: J17.01 158.645,35.169 Q1.3
NetJ18_1: J18.1 R12.2 | length 14
  Bottom Layer w0.4: J18.1 121.546,35.179 126.167,35.179 R12.2
NetJ18_3: J18.3 R13.2 | length 7.5
  Top Layer w0.4: J18.3 117.404,36.117 R13.2
NetQ1_1: Q1.1 Q2.1 U3.7 | length 25.6
  Top Layer w0.4: Q1.1 168.315,41.484 Q2.1
  Bottom Layer w0.4: U3.7 166.05,46.863 Q2.1
NetR4_1: R4.1 R6.2 | length 5.6
  Top Layer w0.4: R6.2 148.519,71.552 148.646,71.425 R4.1
NetR9_1: R9.1 R10.1 R11.2 U2.1 | length 24.4
  Top Layer w0.4: R9.1 109.22,87.813 109.22,83.764 R10.1 111.506,81.478 111.506,77.399 R11.2 110.815,73.058 113.157,70.716 U2.1
PWR_SIN12+: C21.1 J15.3 R1.1 U1.8 | length 139.9
  Top Layer w1.15: U1.8 133.858,104.648 C21.1
  Bottom Layer w1.15: U1.8 134.976,97.79 136.627,99.441 142.316,99.441 150.169,91.588 152.216,91.588 158.766,85.039 166.675,85.039 167.411,84.303 167.411,80.594 170.764,77.241 170.764,72.085 166.37,67.691 R1.1 165.354,64.64 165.354,60.503 170.942,54.915 170.942,34.83 168.761,32.649 153.66,32.649 150.651,35.658 145.936,35.658 144.52,34.242 143.948,34.242 J15.3@143.862,34.156
PWR_SIN12-: C21.2 J15.2 U1.4 | length 94.1
  Top Layer w1.5: C21.2 130.429,94.361 U1.4 128.651,87.757 139.583,87.757 140.462,86.878 140.462,82.423 134.877,76.838 133.985,75.946 133.985,56.415 140.462,49.938 140.462,40.252 J15.2
PWR_ST12+: C19.2 C20.1 J15.1 U2.8 U4.8 | length 73.1
  Top Layer w1.15: U2.8 120.787,66.928 121.131,66.928 121.445,67.18 ccw(c120.727,68.078) 121.449,67.183 122.555,68.071 122.936,68.452 122.936,73.66 122.599,73.997 C19.2
  Top Layer w1.5: C20.1 137.541,73.66 U4.8 142.494,61.976 142.494,40.767 J15.1@149.365,33.896
  Bottom Layer w1.15: C19.2 122.784,76.81 134.391,76.81 C20.1
PWR_ST12-: C19.1 C20.2 J15.4 U2.4 U4.4 | length 83.2
  Top Layer w1.5: C20.2 131.959,74.162 131.959,60.471 130.797,59.309 U4.4 129.921,45.817 141.522,34.217 J15.4
  Bottom Layer w1.15: C19.1 118.671,72.845 128.344,72.845 C20.2
  Bottom Layer w1.5: U2.4 115.57,56.896 127.508,56.896 U4.4
pads on no net: J1.2 J8.2 J10.2 J11.2 J12.2 J13.8 J16.2 U4.5 U4.6 U4.7

## Polygon pours and split planes (outlines as drawn)
GND on Top Layer "NONET_L-01_P-001" (solid, remove dead copper, pour order 0): 71.501,126.492 72.136,127.127 182.245,127.127 182.245,20.701 179.705,18.161 177.673,20.193 72.517,20.193
GND on Bottom Layer "NONET_L-01_P-001" (solid, remove dead copper, pour order 1): 74.549,127.889 185.166,127.889 179.832,122.555 179.832,21.209 73.533,21.209 70.993,23.749

## Other copper
Top Layer:
  region net +12: 89.916,41.656 89.916,38.735 85.598,38.735 85.598,33.274 86.741,32.131 138.049,32.131 138.049,35.052 139.446,35.052 139.446,34.798 139.827,34.417 139.827,26.416 83.947,26.416 83.947,30.099 81.407,30.099 80.645,30.861 80.645,41.783
Bottom Layer:
  region net -12: 89.535,39.116 89.535,36.195 89.408,36.068 85.852,36.068 85.852,32.893 86.741,32.004 135.255,32.004 135.255,35.433 137.795,35.433 137.795,26.035 83.947,26.035 83.947,29.972 83.82,30.099 83.693,29.972 80.645,29.972 80.645,38.862

## Silkscreen, mask and mechanical layers (free items; w line width, h text height)
Top Overlay:
  text "Group_7" at 121.92,50.165 h1.52
  text "-12V" at 136.779,28.829 h0.8 r90
Mechanical 1:
  lines w0.5: 79.883,123.952 177.546,123.952 177.546,25.654 80.01,25.654 80.01,124.079